# EAGLE board f91_main_board_nf (EAGLE 7.5.0)
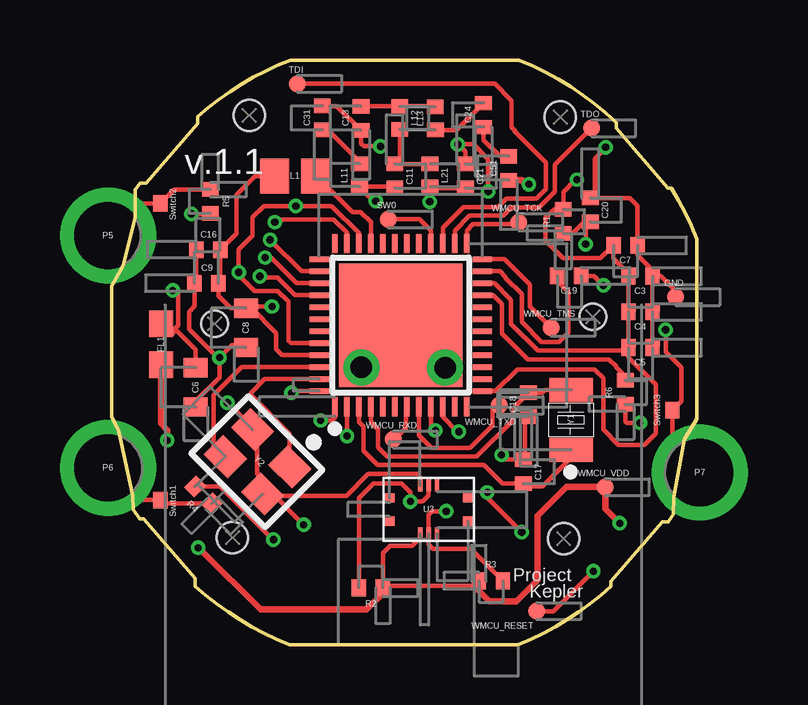
[diagram p0: board, top side]
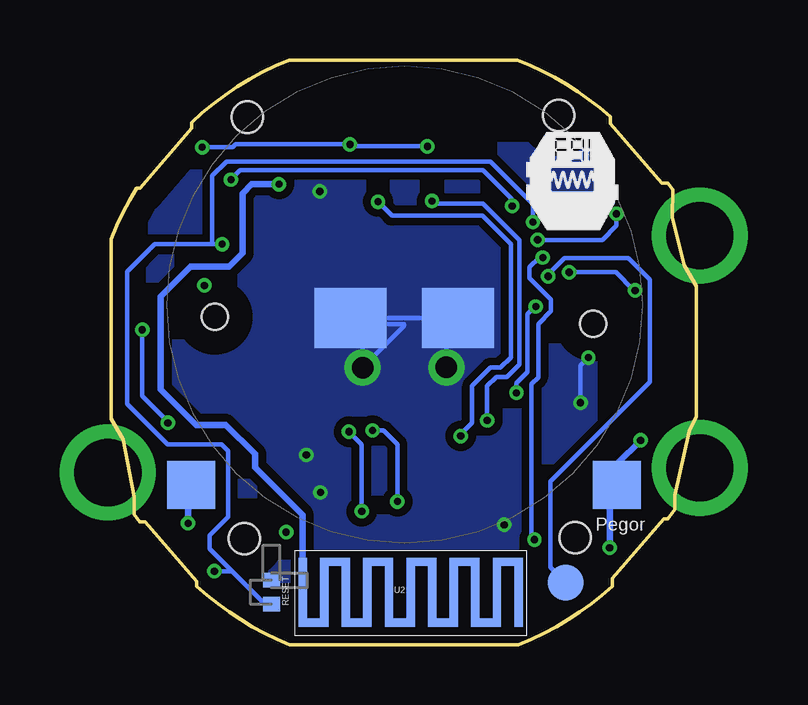
[diagram p1: board, bottom side, seen from below]

Size 24.4 x 24.38 mm. Coordinates in mm from the lower left corner, seen from the top.
Outline: 20.6,22.17 21.05,21.77 21.05,21.52 23.19,19.04 23.33,19.04 23.63,18.53 23.91,18 24.17,17.46 24.4,16.91 24.4,9.42 23.89,8.56 23.44,6.16 23.42,5.44 23.21,5.11 22.97,5.11 20.83,2.63 20.83,2.43 20.39,2.06 19.94,1.7 19.48,1.36 19,1.05 18.51,0.75 18,0.48 17.48,0.22 16.95,0 7.42,0 6.88,0.23 6.35,0.48 5.84,0.75 5.34,1.05 4.85,1.36 4.38,1.7 3.93,2.06 3.49,2.43 3.49,2.77 1.34,5.25 1.17,5.25 0.9,5.64 0.89,6.21 0.29,8.91 0,9.52 0,14.94 0.49,15.81 0.99,17.81 0.99,17.81 0.98,18.98 1.19,19.24 1.44,19.24 3.58,21.72 3.58,22.02 4.02,22.38 4.47,22.73 4.94,23.06 5.42,23.37 5.91,23.65 6.41,23.92 6.93,24.16 7.45,24.38 16.98,24.38 17.54,24.14 18.09,23.87 18.63,23.58 19.14,23.26 19.64,22.92 20.13,22.56 20.6,22.17
Copper layers (1*16): Top 0.035mm / dielectric 1.5mm / Bottom 0.035mm
Design rules "default *": minimum track width 10mil, minimum drill 0.61mm, track to track 8mil, track to pad 8mil, pad to pad 8mil, via to via 8mil, smd to smd 8mil, copper to edge 40mil, drill to drill 8mil, minimum pad ring 0mil, minimum via ring 5mil, stop-mask expansion 2mil, vias tented up to drill 12mil, thermal gap 10mil
Net classes: 0 Default: width 0.18 mm, clearance 0.2 mm
Holes 1.1 mm at 20.07,13.67 4.3,13.38
Holes 1.3 mm at 5.73,22.06 18.71,21.99 18.84,4.43 5.04,4.47
Milling: 7 lines

## Footprints (pad centres in the part's own frame; a part is rotated, then mirrored left to right if it is on the bottom)
CAP_0402 = smd 0.6 x 0.7: 1 -0.51,-0.03; 2 0.49,-0.03
CAP_0603 = smd 0.8 x 1: 1 -0.82,0; 2 0.82,0
CAP_0603_FL1 = smd 1.1 x 1: 1 -0.85,0; 2 0.85,0
single_probe_point = smd 0.7 x 0.7: 1 0.013,-0.002
IND_0805 = smd 1.2 x 1.45: 1 -0.85,0; 2 0.85,0
IND_0402 = smd 0.6 x 0.7: 1 -0.48,0; 2 0.48,0
PAD1 = drill 2.8 pad 4: 1 0,0
Pad = smd 2 x 2: 1 0,0
Pad_Pad3 = smd 3 x 2.5: 1 0,0
Pad_Pad5 = smd 1.5 x 1.5: 1 0,0
Pad_Pad6 = drill 0.9 pad 1.5: 1 0,0
RES_0402 = smd 0.6 x 0.7: 1 -0.66,0.01; 2 0.34,0.01
RES_0402_RESET = smd 0.6 x 0.7: 1 -0.66,0.01; 2 0.34,0.01
SingleConnect = smd 0.7 x 0.6: 1 0,-0.02
SingleConnect_Switch3 = smd 0.7 x 0.6: 1 0,-0.02
BT_ANTENNA = smd 0.35 x 2.88: 1 9.23,1.469; 1_1 0.23,1.468; 1_3 1.13,1.468; 1_5 2.03,1.468; 1_7 2.93,1.468; 1_9 3.83,1.468; 1_11 4.73,1.468; 1_13 5.63,1.469; 1_15 6.53,1.469; 1_17 7.43,1.469; 1_19 8.33,1.469 | smd 0.55 x 0.35: 1_2 0.68,0.203; 1_4 1.58,2.733; 1_6 2.48,0.203; 1_8 3.38,2.733; 1_10 4.28,0.203; 1_12 5.18,2.733; 1_14 6.08,0.204; 1_16 6.98,2.734; 1_18 7.88,0.204; 1_20 8.78,2.734
5050660622 = smd 0.4 x 0.386: 0@ 1.63,-0.501; 0@_1 -1.63,0.465; 0@_2 -1.63,-0.501; 0@_3 1.63,0.465 | smd 0.18 x 0.5: 1 -0.35,0.982; 2 0,0.982; 3 0.35,0.982; 4 -0.35,-1.018; 5 0,-1.018; 6 0.35,-1.018
single_probe_point_WMCU_RESET = smd 0.7 x 0.7: 1 0.013,-0.002
single_probe_point_WMCU_TXD = smd 0.7 x 0.7: 1 0.013,-0.002
FC-135 = smd 1 x 1.8: 1 0.67,1.05; 2 3.17,1.05
TSX-3225 = smd 1.4 x 1.15: 1 0.92,0.73; 2 3.12,0.73; 3 3.12,2.33; 4 0.92,2.33
RGZ0048A-VQFN-48(longer_pads) = smd 0.8 x 0.24: 1 -3.39,2.75; 2 -3.39,2.25; 3 -3.39,1.75; 4 -3.39,1.25; 5 -3.39,0.75; 6 -3.39,0.25; 7 -3.39,-0.25; 8 -3.39,-0.75; 9 -3.39,-1.25; 10 -3.39,-1.75; 11 -3.39,-2.25; 12 -3.39,-2.75; 25 3.41,-2.75; 26 3.41,-2.25; 27 3.41,-1.75; 28 3.41,-1.25; 29 3.41,-0.75; 30 3.41,-0.25; 31 3.41,0.25; 32 3.41,0.75; 33 3.41,1.25; 34 3.41,1.75; 35 3.41,2.25; 36 3.41,2.75 | smd 0.24 x 0.8: 13 -2.74,-3.4; 14 -2.24,-3.4; 15 -1.74,-3.4; 16 -1.24,-3.4; 17 -0.74,-3.4; 18 -0.24,-3.4; 19 0.26,-3.4; 20 0.76,-3.4; 21 1.26,-3.4; 22 1.76,-3.4; 23 2.26,-3.4; 24 2.76,-3.4; 37 2.76,3.4; 38 2.26,3.4; 39 1.76,3.4; 40 1.26,3.4; 41 0.76,3.4; 42 0.26,3.4; 43 -0.24,3.4; 44 -0.74,3.4; 45 -1.24,3.4; 46 -1.74,3.4; 47 -2.24,3.4; 48 -2.74,3.4 | smd 5.15 x 5.15: 49 0.01,0

## Placement (x,y rotation side)
C3  100nF  [CAP_0402]  22.04,15.34 179.9 top
C4  100nF  [CAP_0402]  22.04,13.85 179.9 top
C5  100nF  [CAP_0402]  22.04,12.36 179.9 top
C6  10uF  [CAP_0603]  3.51,10.73 90 top
C7  100nF  [CAP_0402]  21.42,16.62 179.9 top
C8  10uF  [CAP_0603]  5.61,13.21 90 top
C9  100nF  [CAP_0402]  3.97,15.1 0 top
C11  1pF  [CAP_0402]  11.84,19.53 270 top
C13  1pF  [CAP_0402]  10.37,21.96 90 top
C16  100nF  [CAP_0402]  4.04,16.49 0 top
C17  12pF  [CAP_0402]  17.2,7.21 270 top
C18  12pF  [CAP_0402]  17.35,10.01 90 top
C19  1uF  [CAP_0402]  19.07,15.35 180 top
C20  100nF  [CAP_0402]  19.99,18.12 270 top
C21  1pF  [CAP_0402]  14.78,19.53 270 top
C24  12pF  [CAP_0402]  15.48,22.09 90 top
C31  6.8pF  [CAP_0402]  8.76,21.97 90 top
C51  1.8pF  [CAP_0402]  16.53,19.87 90 top
FL1  BLM18HE152SN1  [CAP_0603_FL1]  2.06,12.53 90 top
GND  GND  [single_probe_point]  23.51,14.5 0 top
L1  10uH  [IND_0805]  7.65,19.54 180 top
L11  2.4nH  [IND_0402]  10.34,19.57 90 top
L12  2nH  [IND_0402]  12.02,21.97 270 top
L13  2nH  [IND_0402]  13.5,21.94 90 top
L21  2.4nH  [IND_0402]  13.28,19.57 270 top
P5  CONN_01X01  [PAD1]  -0.15,17.05 0 top
P6  CONN_01X01  [PAD1]  -0.15,7.37 0 top
P7  CONN_01X01  [PAD1]  24.53,7.17 0 top
Pad1  Pad  [Pad]  3.31,6.66 0 bottom
Pad2  Pad  [Pad]  21.07,6.66 0 bottom
Pad3  Pad  [Pad_Pad3]  9.93,13.61 0 bottom
Pad4  Pad  [Pad_Pad3]  14.41,13.61 0 bottom
Pad5  Pad  [Pad_Pad5]  5.44,2.58 0 bottom
Pad6  Pad  [Pad_Pad6]  10.42,11.56 0 top
Pad7  Pad  [Pad_Pad6]  13.91,11.55 0 top
R1  100k  [RES_0402]  18.84,17.81 90 top
R2  3.3k  [RES_0402]  10.65,2.38 180 top
R3  3.3k  [RES_0402]  15.98,2.65 0 top
R4  100  [RES_0402]  3.73,6.36 135 top
R5  100  [RES_0402]  4.11,18.32 270 top
R6  100  [RES_0402]  21.43,10.68 90 top
RESET  N/A DO NOT CONNECT  [RES_0402_RESET]  17.72,2.03 270 bottom
SW0  SW0  [single_probe_point]  11.52,17.74 0 top
Switch1  SingleConnect  [SingleConnect]  2.01,6.03 90 top
Switch2  SingleConnect  [SingleConnect]  2.01,18.4 90 top
Switch3  SingleConnect  [SingleConnect_Switch3]  23.36,9.78 90 top
TDI  TDI  [single_probe_point]  7.74,23.39 0 top
TDO  TDO  [single_probe_point]  20,21.54 0 top
U2  BT_Antenna  [BT_ANTENNA]  16.64,0.72 0 bottom
U3  5050660622  [5050660622]  13.22,5.65 0 top
WMCU_RESET  WMCU_RESET  [single_probe_point_WMCU_RESET]  17.72,1.4 0 top
WMCU_RXD  WMCU_RXD  [single_probe_point]  11.73,8.56 0 top
WMCU_TCK  single_probe point  [single_probe_point]  16.96,17.62 0 top
WMCU_TMS  WMCU_TMS  [single_probe_point]  18.31,13.22 0 top
WMCU_TXD  WMCU_TXD  [single_probe_point_WMCU_TXD]  16.15,9.98 0 top
WMCU_VDD  WMCU_VDD  [single_probe_point]  20.57,6.57 0 top
Y1  32.768kHz  [FC-135]  20.21,7.45 90 top
Y2  24MHz  [TSX-3225]  8.6,7.28 135 top
  CC2640(long pads)  [RGZ0048A-VQFN-48(longer_pads)]  12.06,13.31 90 top

## Library data of the parts
C3-C5 C7 C9 C11 C13 C16-C21 C24 C31 C51 = common; ORIGINAL_NAME: CAP_0402
C6 C8 = common; ORIGINAL_NAME: CAP_0603
FL1 = common; ORIGINAL_NAME: BLM18HE152SN1
GND P5-P7 Pad1-Pad7 SW0 Switch1-Switch3 TDI TDO WMCU_RESET WMCU_RXD WMCU_TCK WMCU_TMS WMCU_TXD WMCU_VDD = common
L1 = common; ORIGINAL_NAME: IND_0805
L11-L13 L21 = common; ORIGINAL_NAME: IND_0402
R1-R6 RESET = common; ORIGINAL_NAME: RES_0402
U2 = common; ORIGINAL_NAME: BT_Antenna
U3 = common; MANUFACTURER: Molex; ORIGINAL_NAME: 5050660622
Y1 = common; ORIGINAL_NAME: FC-135
Y2 = common; ORIGINAL_NAME: TSX-3225
 = common; ORIGINAL_NAME: CC2640(long pads)

## Nets
Net_0: .49 C3.1 C4.1 C5.1 C6.1 C7.1 C8.1 C9.1 C13.1 C16.1 C17.1 C18.1 C19.1 C20.1 C21.1 C31.2 GND.1 Pad3.1 Pad4.1 Pad6.1 Pad7.1 RESET.1 U3.1 Y2.2 Y2.4
Net_1: FL1.1 Pad1.1 Pad2.1 R2.1 R3.1 U3.4 WMCU_VDD.1
Net_2: .13 .22 .34 .44 C3.2 C4.2 C5.2 C6.2 C7.2 FL1.2 R1.2
Net_3: .33 L1.1
Net_4: .45 .48 C8.2 C9.2 C16.2 L1.2
Net_5: .25 WMCU_TCK.1
Net_6: .24 WMCU_TMS.1
Net_7: .35 C20.2 R1.1 RESET.2 WMCU_RESET.1
Net_8: .3 C17.2 Y1.1
Net_9: .4 C18.2 Y1.2
Net_10: .23 C19.2
Net_11: .47 Y2.1
Net_12: .46 Y2.3
Net_13: .2 C21.2 L21.2
Net_14: .1 C11.2 L11.1
Net_15: C31.1 L11.2
Net_16: C11.1 L12.2 L21.1
Net_17: C13.2 L12.1 L13.2
Net_18: C24.2 L13.1
Net_19: C24.1 C51.2
Net_20: C51.1 U2.1 U2.1_1 U2.1_2 U2.1_3 U2.1_4 U2.1_5 U2.1_6 U2.1_7 U2.1_8 U2.1_9 U2.1_10 U2.1_11 U2.1_12 U2.1_13 U2.1_14 U2.1_15 U2.1_16 U2.1_17 U2.1_18 U2.1_19 U2.1_20
Net_21: .7 WMCU_RXD.1
Net_22: .8 WMCU_TXD.1
Net_23: .26 TDO.1
Net_24: .27 TDI.1
Net_25: .28 SW0.1
Net_26: .40 Pad5.1
Net_30: .10 R3.2 U3.5
Net_31: .9 R2.2 U3.2
Net_32: .21 R6.2
Net_33: .38 R5.2
Net_34: .39 R4.2
Net_35: P6.1 R4.1 Switch1.1
Net_36: P5.1 R5.1 Switch2.1
Net_37: P7.1 R6.1 Switch3.1

## Tracks (layer width: path | path; a pad name or v marks a point on that pad's centre or on a via)
Net_0  (via drill 0.3 pad 0.6)
  Top 0.18: C31.2 9.39,22.46 C13.1 10.4,20.9 10.52,20.78 v11.21,20.78 | C21.1 14.75,20.55 v14.44,20.86 15.08,20.86 15.7,20.24 v15.7,18.9 | v20.6,20.74 20.6,20.7 20.16,20.26 20.16,18.63 C20.1 21.6,18.63 21.93,18.3 C7.1 21.93,16.24 22.55,15.62 C3.1 | C5.1 C4.1 | C4.1 | C4.1 C3.1 | C3.1 | C18.1 17.23,9.35 17.23,7.72 C17.1 16.45,7.72 v16.26,7.91 | U3.1 12.87,6.99 12.75,7.11 10.7,7.11 9.79,6.2 6.38,6.2 Y2.4 | C16.1 3.53,15.14 C9.1 3.46,14.11 3.23,13.88 3.23,13.17 4.43,11.97 v4.5,11.97 | C3.1 22.9,15.37 23.52,14.75 GND.1 | Y2.4 6.72,6.28 v8.01,5 | Y2.4 6.3,6.89 6.07,7.12 6.07,8.78 Y2.2 5.88,9.04 v4.83,10.09 | C6.1 3.51,10.16 4.5,11.15 v4.5,11.97 | v4.5,11.97 5.03,12.5 5.5,12.5 C8.1 | v15.67,6.35 15.67,6.12 v17.1,4.69 | C19.1 20.11,15.38 v20.51,14.98
  Bottom 0.18: v11.21,20.78 14.36,20.78 v14.44,20.86 19.21,20.86 19.33,20.74 v20.6,20.74 | Pad6.1 10.42,13.12 Pad3.1 | Pad4.1 13.91,13.11 Pad7.1 12.18,13.28 12.18,13.38 14.18,13.38 Pad4.1 | Pad4.1 Pad3.1 | Pad3.1 | v4.83,10.09 4.83,11.64 v4.5,11.97
  pour Bottom (isolate 0.33, no thermals): 4.39,20.64 20.11,20.64 22.64,17.74 22.64,9.26 17.85,2.89 6.95,2.79 6.95,5.76 4.41,8.43
Net_1  (via drill 0.3 pad 0.6)
  Top 0.18: U3.4 12.87,4.46 12.52,4.11 11.6,4.11 11.31,3.82 R2.1 11.31,2.46 15.32,2.46 R3.1
  Top 0.28: R3.1 15.32,2.25 15.76,1.81 16.88,1.81 17.76,2.69 17.76,5.37 18.95,6.57 WMCU_VDD.1 20.58,5.67 v21.19,5.06 | R2.1 11.35,2.37 11.35,2.18 10.64,1.47 6.21,1.47 3.78,3.9 3.78,4.04 v3.61,4.04 | FL1.1 2.06,9.22 2.32,8.96 v2.32,8.52
  Bottom 0.28: v21.19,5.06 21.19,6.54 Pad2.1 | v3.61,4.04 3.61,6.36 Pad1.1 3.31,7.53 v2.32,8.52
Net_2  (via drill 0.3 pad 0.6)
  Top 0.18: C5.2 C4.2 C3.2 21.55,15.47 20.93,16.09 C7.2 20.39,16.11 18.82,16.11 18.09,16.84 18.09,17.8 18.44,18.15 R1.2 18.83,18.88 19.34,19.39 v19.4,19.39 | .22 15.97,15.07 16.66,14.38 16.66,13.38 17.77,12.27 21.55,12.27 C5.2 | .34 10.31,17.16 9.18,18.29 v7.68,18.29 6.36,18.29 5.89,17.82 5.89,17.06 5.3,16.47 v5.3,15.53 5.3,15.42 5.97,14.75 6.93,14.75 7.38,14.3 7.38,12.67 7.48,12.57 .44 | FL1.2 | FL1.2 2.5,12.94 | 2.5,12.94 2.69,13.13 3.51,12.31 C6.2 | .13 16.01,10.57 16.92,11.48 20.14,11.48 20.5,11.12 20.5,8.97 21.14,8.33 22.21,8.33 22.69,8.81 22.69,10.84 21.55,11.98 C5.2 | 2.5,12.94 2.41,12.94 2.78,13.31 2.78,14.72 2.47,14.72 2.52,14.77 v2.55,14.77
  Bottom 0.18: v2.55,14.77 2.6,14.77 3.36,15.53 v5.3,15.53 | v7.68,18.29 7.68,18.57 8.89,19.78 19.01,19.78 v19.4,19.39
Net_3
  Top 0.18: L1.1 8.55,19.54 10.05,18.04 10.38,18.04 10.81,17.61 .33
Net_4  (via drill 0.3 pad 0.6)
  Top 0.18: L1.2 5.99,19.54 5.21,18.76 5.21,17.14 C16.2 4.53,15.14 C9.2 4.46,14.53 4.96,14.03 C8.2 | C8.2 5.83,14.03 6.86,13 6.86,12.33 7.12,12.07 .45 | .48 7.57,10.57 v7.5,10.5 | v6.69,14.1 5.68,14.1 C8.2
  Bottom 0.18: v7.5,10.5 7.5,10.91 7.03,11.38 7.03,13.79 6.72,14.1 v6.69,14.1
Net_5
  Top 0.18: WMCU_TCK.1 16.97,17.53 15.07,17.53 14.81,17.27 .25
Net_6
  Top 0.18: WMCU_TMS.1 17.45,14.09 17.45,15.01 16.39,16.07 .24
Net_7  (via drill 0.3 pad 0.6)
  Top 0.18: R1.1 19.21,17.15 19.69,17.63 C20.2 19.77,17.44 v19.77,16.7 | .35 9.81,17.18 9.26,17.73 6.92,17.73 v6.81,17.62 | WMCU_RESET.1 18.43,1.4 v20.09,3.06
  Bottom 0.18: v6.81,17.62 6.81,18.37 8.59,20.15 19.58,20.15 20.18,19.55 20.18,16.7 v19.77,16.7 22.58,16.7 23.72,15.56 23.72,10.04 22.03,8.35 19.78,8.35 19.51,8.08 19.51,5.32 20.28,4.55 20.28,3.99 19.35,3.06 | RESET.2 17.98,1.69 19.35,3.06 | v20.09,3.06 19.35,3.06
Net_8
  Top 0.18: Y1.1 19.16,7.79 17.96,6.59 17.17,6.59 C17.2 16.3,6.72 15.53,7.49 11.09,7.49 10.5,8.08 10.5,9.1 10.31,9.29 .3
Net_9
  Top 0.18: Y1.2 18.06,10.62 17.94,10.5 C18.2 16.75,9.87 16.75,9.38 15.22,7.85 11.48,7.85 11.11,8.22 11.11,8.98 10.81,9.28 .4
Net_10
  Top 0.18: .23 16.19,15.57 16.43,15.33 16.43,15.28 17.1,14.61 17.1,13.45 17.93,12.62 18.66,12.62 19.05,13.01 19.05,14.7 18.58,15.17 C19.2
Net_11
  Top 0.18: Y2.1 7.43,8.79 5.8,10.43 5.8,10.48 6.39,11.07 .47
Net_12
  Top 0.18: Y2.3 4.67,7.84 4.26,8.25 4.26,10.41 5.42,11.57 .46
Net_13  (via drill 0.3 pad 0.6)
  Top 0.18: C21.2 13.32,19.04 L21.2 v13.28,18.48 v13.27,18.47 | .2 v9.81,8.71 v9.82,8.7
  Bottom 0.18: v9.82,8.7 9.82,8.78 9.35,9.25 9.35,10.79 8.59,11.55 8.16,11.55 7.73,11.98 7.73,16.7 8.92,17.89 12.69,17.89 v13.27,18.47
Net_14  (via drill 0.3 pad 0.6)
  Top 0.18: C11.2 11.76,19.09 L11.1 10.93,18.5 v11.02,18.5 | v8.72,9.35 9.19,9.35 9.31,9.47 .1
  Bottom 0.18: v8.72,9.35 8.72,10.79 8.34,11.17 7.89,11.17 7.37,11.69 7.37,16.86 8.9,18.39 10.91,18.39 v11.02,18.5
Net_15
  Top 0.18: L11.2 10.34,20.14 9.02,21.46 C31.1
Net_16
  Top 0.18: L12.2 12.02,20.25 C11.1 L21.1
Net_17
  Top 0.18: C13.2 L12.1 | L12.1 | L12.1 13.47,22.45 L13.2
Net_18
  Top 0.18: L13.1 14.39,21.46 C24.2
Net_19
  Top 0.18: C24.1 15.51,21.04 16.19,20.36 C51.2
Net_20  (via drill 0.3 pad 0.6)
  Top 0.28: v17.4,19.2 17.26,19.2 17.1,19.36 C51.1
  Bottom 0.28: v17.4,19.2 18.53,19.2 18.92,18.81 18.92,16.33 19.48,15.77 21.08,15.77 22.34,14.51 22.34,10.65 20.86,9.17 19.62,9.17 18.4,7.95 18.4,7.4 16.41,5.41 U2.1_1
Net_21
  Top 0.18: WMCU_RXD.1 11.79,8.56 12.28,9.04 12.28,9.83 12.31,9.86 .7
Net_22
  Top 0.18: WMCU_TXD.1 16.16,9.9 15.89,9.9 15.89,9.15 14.95,8.21 13.33,8.21 12.81,8.73 .8
Net_23
  Top 0.18: .26 14.31,17.27 14.93,17.89 16.33,17.89 16.66,18.22 17.82,18.22 18.49,18.89 18.49,20.01 TDO.1
Net_24
  Top 0.18: .27 13.81,17.39 14.67,18.25 16.12,18.25 16.47,18.6 17.72,18.6 18.11,18.99 18.11,20.1 16.8,21.41 16.84,21.41 16.68,21.57 16.68,22.69 15.98,23.39 TDI.1
Net_25
  Top 0.18: .28 13.31,17.26 12.83,17.74 SW0.1
Net_26  (via drill 0.3 pad 0.6)
  Top 0.18: .40 7.66,14.57 6.93,15.3 6.24,15.3 v6.18,15.36
  Bottom 0.18: v6.18,15.36 6.18,15.43 5.5,16.11 2.83,16.11 1.94,15.22 1.94,10.95 6.08,6.81 6.08,3.22 Pad5.1
Net_30  (via drill 0.3 pad 0.6)
  Top 0.18: .10 13.81,9.5 14.43,8.88 v14.48,8.88 | v13.95,5.56 13.37,5.56 13.22,5.41 U3.5 13.22,4.18 13.41,3.99 14.99,3.99 R3.2
  Bottom 0.18: v13.95,5.56 13.95,8.35 v14.48,8.88
Net_31  (via drill 0.3 pad 0.6)
  Top 0.18: v13.5,8.93 13.47,8.93 13.31,9.09 .9 | U3.2 13.22,6.22 12.97,5.97 v12.46,5.97 12.46,6.35 12.08,6.73 10.92,6.73 10.31,6.12 R2.2
  Bottom 0.18: v12.46,5.97 12.46,8.35 13.04,8.93 v13.5,8.93
Net_32
  Top 0.18: .21 15.9,14.57 16.27,14.2 16.27,12.98 17.36,11.89 20.74,11.89 21.04,11.59 21.04,11.56 21.42,11.18 R6.2
Net_33  (via drill 0.3 pad 0.6)
  Top 0.18: .38 7.92,15.57 v6.61,16.88 | v3.33,17.96 4.1,17.96 R5.2
  Bottom 0.18: v6.61,16.88 3.92,16.88 3.33,17.47 v3.33,17.96
Net_34  (via drill 0.3 pad 0.6)
  Top 0.18: .39 7.72,15.07 6.65,16.14 v6.4,16.14 | v6.75,4.38 6.62,4.38 6.62,4.5 4.52,6.59 R4.2
  Bottom 0.18: v6.4,16.14 6.55,16.14 6.95,15.74 6.95,15.29 6.06,14.4 6.06,13.91 6.59,13.38 6.59,11.15 6.88,10.86 6.88,4.51 v6.75,4.38
Net_35
  Top 0.18: P6.1 1.19,6.03 Switch1.1 2.17,5.89 R4.1
Net_36
  Top 0.18: R5.1 2.61,18.98 Switch2.1 1.19,18.4 P5.1
Net_37  (via drill 0.3 pad 0.6)
  Top 0.18: R6.1 21.42,9.31 21.48,9.25 v22.03,9.25 | v23.1,13.13 23.1,12.2 23.75,11.55 23.75,10.15 Switch3.1 23.38,8.32 P7.1
  Bottom 0.18: v22.03,9.25 22.03,9.3 23.1,10.37 v23.1,13.13

## Text on the board
tPlace: v.1.1 | Project | Kepler
bPlace: Pegor